# Altium PCB 主板-双BH(1).PcbDoc (part 13 of 13)
Units mm, origin at the board's own origin, x right, y up, seen from the top; angles counter-clockwise.
Board outline 97.69 x 103.45 mm, 2 copper layers (Top Layer, Bottom Layer); 78 components, 75 nets, 243 pads, 279 vias.
Unrouted connection lines stored in the file: 7.
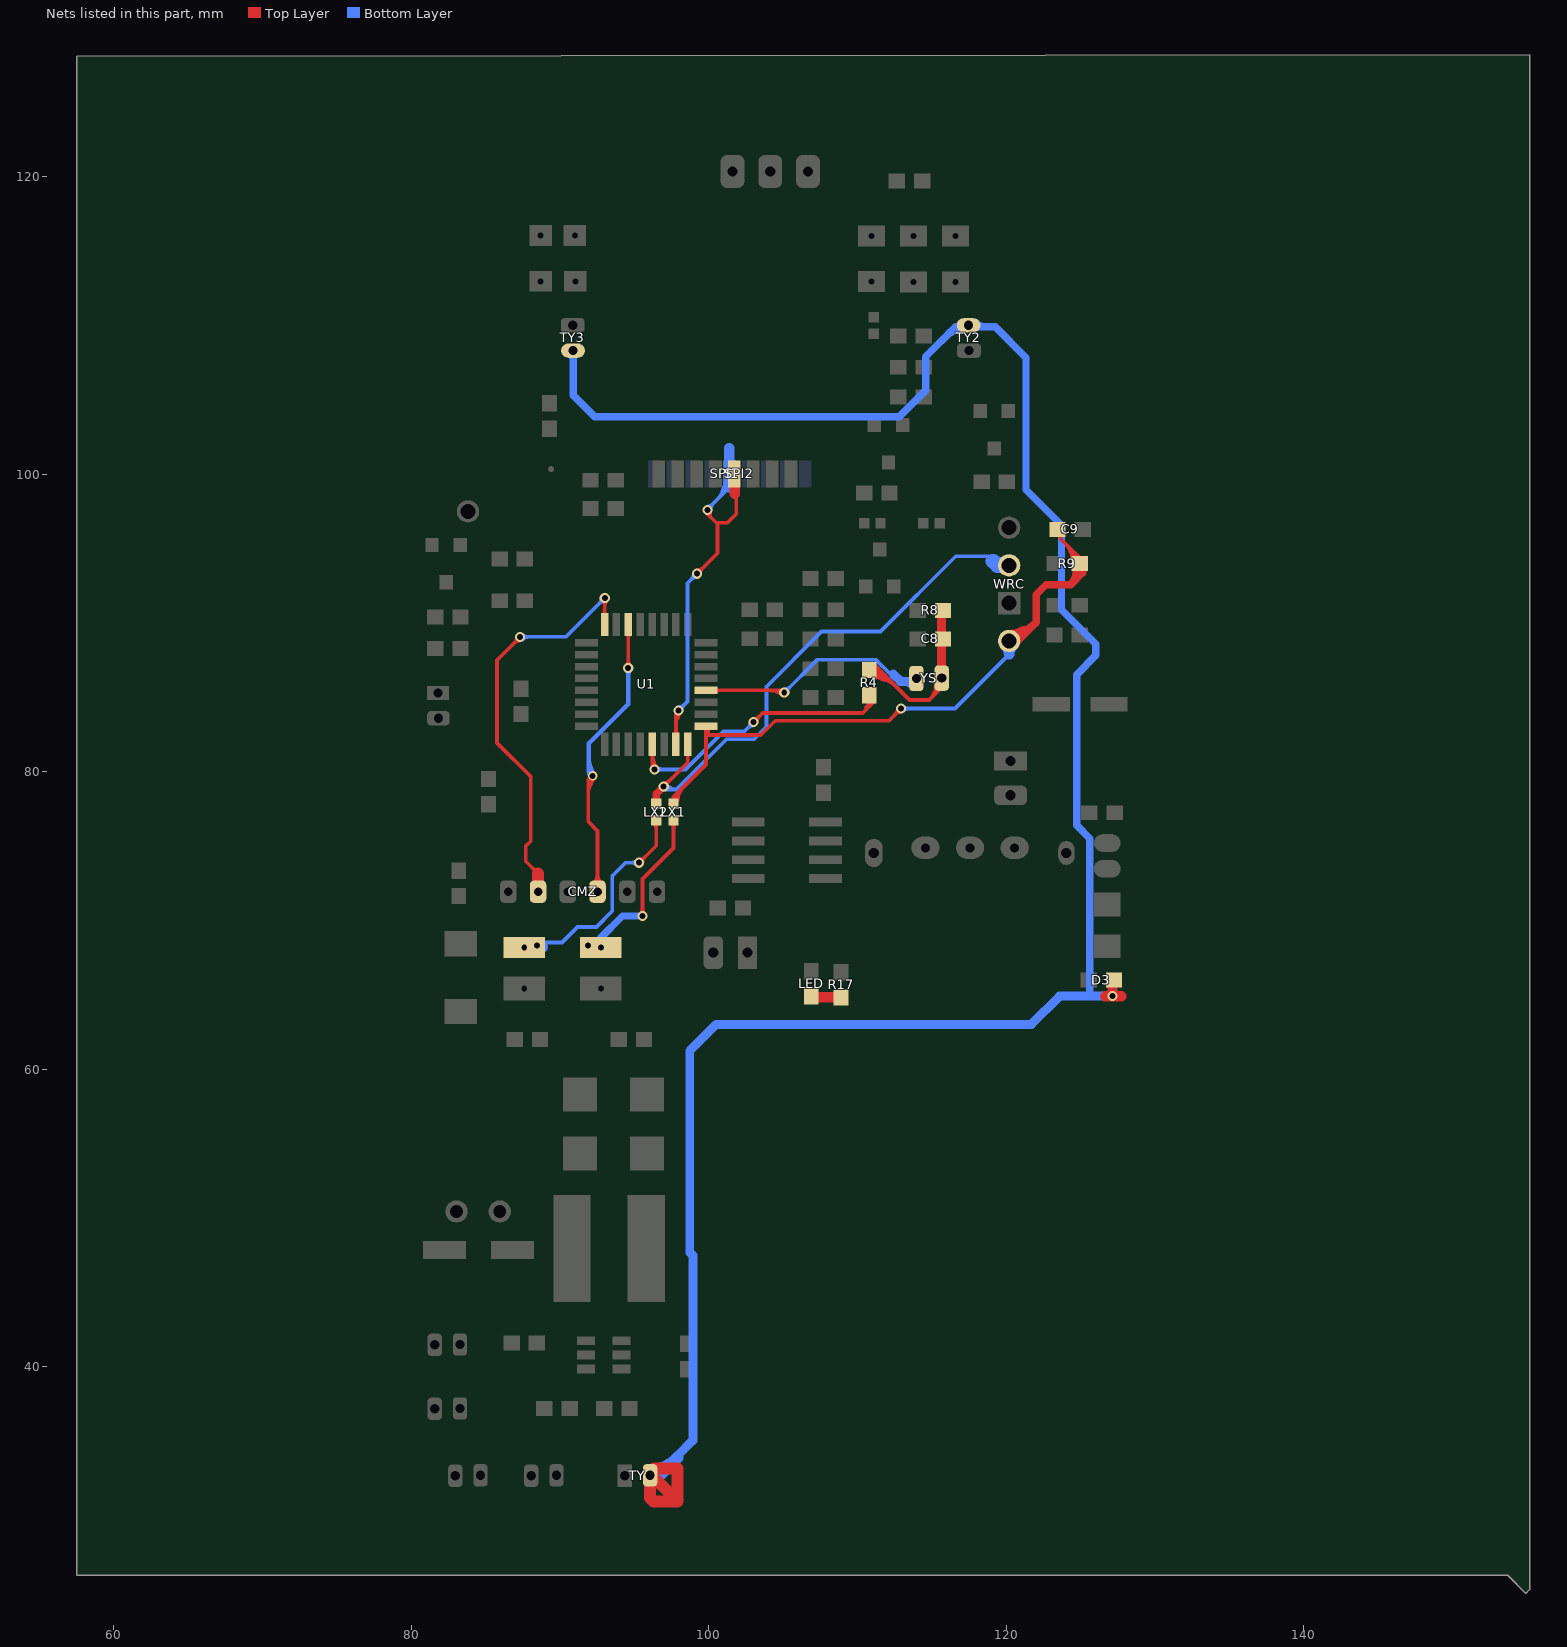
[diagram p13: the nets of this part, all layers, seen from the top]

## Via types
v1: diameter 0.7, hole 0.4, Top Layer to Bottom Layer, 108 vias
v2: diameter 0.68, hole 0.4, Top Layer to Bottom Layer, 87 vias
v3: diameter 0.8, hole 0.5, Top Layer to Bottom Layer, tented both sides, 33 vias
v4: diameter 0.6, hole 0.4, Top Layer to Bottom Layer, 12 vias
v5: diameter 0.9, hole 0.5, Top Layer to Bottom Layer, 8 vias
v6: diameter 0.8, hole 0.5, Top Layer to Bottom Layer, 6 vias
v7: diameter 1, hole 0.75, Top Layer to Bottom Layer, tented both sides, 5 vias
v8: diameter 3.4, hole 2.9, Top Layer to Bottom Layer, 4 vias
v9: diameter 1, hole 0.6, Top Layer to Bottom Layer, tented both sides, 3 vias
v10: diameter 1, hole 0.56, Top Layer to Bottom Layer, tented both sides, 2 vias
v11: diameter 1.1, hole 0.68, Top Layer to Bottom Layer, 2 vias
v12: diameter 0.8, hole 0.4, Top Layer to Bottom Layer, 2 vias
v13: diameter 0.65, hole 0.4, Top Layer to Bottom Layer, tented both sides, 2 vias
v14: diameter 1, hole 0.6, Top Layer to Bottom Layer, tented bottom, 1 vias
v15: diameter 0.7, hole 0.4, Top Layer to Bottom Layer, tented bottom, 1 vias
v16: diameter 0.95, hole 0.5, Top Layer to Bottom Layer, 1 vias
v17: diameter 0.64, hole 0.4, Top Layer to Bottom Layer, 1 vias
v18: diameter 0.62, hole 0.4, Top Layer to Bottom Layer, 1 vias

## Nets (pads, with @x,y where several pads share a name; then routed paths per layer and width w, separated by ;. In a path a pad name is that pad's centre, name@x,y a point inside that pad or via, vN(x,y) a via of type N, cw(c..) or ccw(c..) an arc to the next point about the centre after c; other vN are vias at no path point) (continued)
RST: C9.2 LX1.1 LX1.2 pad.0@92.75,68.182 R9.1 U1.1 WRC.1 | length 126.1
  Top Layer w0.254: v2@95.549,70.307 95.549,72.791 97.638,74.879 LX1.1@97.638,76.742 ; LX1.2@97.4,77.842 97.638,78.08 97.638,78.308 ; U1.1@99.977,83.122 U1.1@99.977,83.077 ; U1.1@100.082,82.931 U1.1@100.076,82.925 ; v2@112.878,84.252 v2(112.928,84.252) 112.116,83.439 104.47,83.439 103.505,82.474 100.025,82.474 99.977,82.522 U1.1@99.977,82.904 ; C9.2@123.45,96.3 123.699,96.051 123.699,95.63 125.12,94.209 R9.1@125.12,94.005 ; 124.416,94.625 cw(c124.07,94.266) R9.1@124.545,94.114 ; 124.531,94.515 ccw(c124.883,94.881) R9.1@124.893,94.373 ; v2@95.404,70.458 ccw(c95.055,70.807) 95.549,70.807 ; v2@95.404,70.458 ccw(c95.055,70.807) 95.549,70.807 ; v2@95.404,70.458 ccw(c95.055,70.807) 95.549,70.807 ; 95.549,70.836 ccw(c96.083,70.836) v2@95.705,70.458 ; 95.549,70.836 ccw(c96.083,70.836) v2@95.705,70.458 ; 95.549,70.836 ccw(c96.083,70.836) v2@95.705,70.458 ; LX1.1@97.48,76.584 cw(c97.099,76.204) 97.638,76.204 ; LX1.1@97.48,76.584 cw(c97.099,76.204) 97.638,76.204 ; LX1.1@97.48,76.584 cw(c97.099,76.204) 97.638,76.204 ; LX1.2@97.498,78.016 ccw(c97.262,78.308) 97.638,78.308 ; LX1.2@97.498,78.016 ccw(c97.262,78.308) 97.638,78.308 ; LX1.2@97.498,78.016 ccw(c97.262,78.308) 97.638,78.308 ; LX1.2@97.526,78.035 ccw(c97.308,78.413) 97.729,78.3 ; LX1.2@97.526,78.035 ccw(c97.308,78.413) 97.729,78.3 ; LX1.2@97.526,78.035 ccw(c97.308,78.413) 97.729,78.3 ; LX1.2@97.607,77.842 cw(c98.657,77.842) 97.914,78.585 ; LX1.2@97.607,77.842 cw(c98.657,77.842) 97.914,78.585 ; LX1.2@97.607,77.842 cw(c98.657,77.842) 97.914,78.585 ; 97.638,76.204 cw(c98.176,76.204) LX1.1@97.795,76.584 ; 97.638,76.204 cw(c98.176,76.204) LX1.1@97.795,76.584 ; 97.638,76.204 cw(c98.176,76.204) LX1.1@97.795,76.584 ; 97.638,78.308 ccw(c98.013,78.308) LX1.2@97.778,78.016 ; 97.638,78.308 ccw(c98.013,78.308) LX1.2@97.778,78.016 ; 97.638,78.308 ccw(c98.013,78.308) LX1.2@97.778,78.016 ; 97.638,78.308 99.825,80.496 U1.1@99.825,82.904 ; LX1.2@97.653,77.815 ccw(c97.323,78.387) 97.961,78.216 ; LX1.2@97.653,77.815 ccw(c97.323,78.387) 97.961,78.216 ; LX1.2@97.653,77.815 ccw(c97.323,78.387) 97.961,78.216 ; 97.734,78.317 ccw(c98.088,78.222) LX1.2@97.808,77.986 ; 97.734,78.317 ccw(c98.088,78.222) LX1.2@97.808,77.986 ; 97.734,78.317 ccw(c98.088,78.222) LX1.2@97.808,77.986 ; LX1.2@97.861,77.842 cw(c99.524,77.842) 98.348,79.019 ; LX1.2@97.861,77.842 cw(c99.524,77.842) 98.348,79.019 ; LX1.2@97.861,77.842 cw(c99.524,77.842) 98.348,79.019 ; U1.1@99.738,82.99 cw(c99.528,82.781) 99.825,82.781 ; U1.1@99.738,82.99 cw(c99.528,82.781) 99.825,82.781 ; U1.1@99.738,82.99 cw(c99.528,82.781) 99.825,82.781 ; U1.1@99.748,82.982 cw(c99.36,82.501) 99.977,82.501 ; U1.1@99.748,82.982 cw(c99.36,82.501) 99.977,82.501 ; U1.1@99.748,82.982 cw(c99.36,82.501) 99.977,82.501 ; 99.825,82.781 cw(c100.122,82.781) U1.1@99.912,82.99 ; 99.825,82.781 cw(c100.122,82.781) U1.1@99.912,82.99 ; 99.825,82.781 cw(c100.122,82.781) U1.1@99.912,82.99 ; U1.1@99.825,82.904 U1.1@99.977,82.904 ; U1.1@99.825,82.904 U1.1@99.825,83.077 ; U1.1@99.825,83.077 U1.1@99.977,83.077 ; U1.1@99.825,83.077 100.228,83.077 U1.1@100.076,82.925 ; 99.914,82.754 cw(c100.076,82.873) U1.1@99.92,83 ; 99.914,82.754 cw(c100.076,82.873) U1.1@99.92,83 ; 99.914,82.754 cw(c100.076,82.873) U1.1@99.92,83 ; U1.1@99.977,82.904 100.076,82.904 U1.1@100.076,82.925 ; U1.1@99.977,82.904 U1.1@99.977,83.077 ; 112.565,83.888 ccw(c112.201,84.252) v2@112.715,84.252 ; 112.565,83.888 cw(c112.928,83.525) v2@112.928,84.039 ; 112.565,83.888 ccw(c112.201,84.252) v2@112.715,84.252 ; 112.565,83.888 cw(c112.928,83.525) v2@112.928,84.039 ; 112.565,83.888 ccw(c112.201,84.252) v2@112.715,84.252 ; 112.565,83.888 cw(c112.928,83.525) v2@112.928,84.039 ; C9.2@123.426,95.934 cw(c123.359,95.602) 123.699,95.602 ; C9.2@123.426,95.934 cw(c123.359,95.602) 123.699,95.602 ; C9.2@123.426,95.934 cw(c123.359,95.602) 123.699,95.602 ; 123.96,95.369 cw(c122.591,94) R9.1@124.527,94 ; 123.96,95.369 cw(c122.591,94) R9.1@124.527,94 ; 123.96,95.369 cw(c122.591,94) R9.1@124.527,94 ; 124.261,94.994 ccw(c125.655,95.368) R9.1@124.957,94.104 ; 124.261,94.994 ccw(c125.655,95.368) R9.1@124.957,94.104 ; 124.261,94.994 ccw(c125.655,95.368) R9.1@124.957,94.104 ; 124.393,94.936 cw(c123.458,94) R9.1@124.781,94 ; 124.393,94.936 cw(c123.458,94) R9.1@124.781,94 ; 124.393,94.936 cw(c123.458,94) R9.1@124.781,94 ; R9.1@124.415,94.418 ccw(c125.255,94.643) R9.1@124.835,93.882 ; R9.1@124.415,94.418 ccw(c125.255,94.643) R9.1@124.835,93.882 ; R9.1@124.415,94.418 ccw(c125.255,94.643) R9.1@124.835,93.882 ; R9.1@124.577,94.186 ccw(c124.137,94.441) 124.628,94.572 ; R9.1@124.577,94.186 ccw(c124.137,94.441) 124.628,94.572 ; R9.1@124.577,94.186 ccw(c124.137,94.441) 124.628,94.572 ; 124.827,94.502 cw(c124.325,94) R9.1@125.035,94 ; 124.827,94.502 cw(c124.325,94) R9.1@125.035,94 ; 124.827,94.502 cw(c124.325,94) R9.1@125.035,94
  Top Layer w0.5: WRC.1@120.349,89.277 ccw(c120.474,89.678) 120.774,89.384 ccw(c121.073,89.089) WRC.1@120.675,88.957 ; R9.1@125.12,94.005 125.15,93.976 125.15,93.4 124.333,92.583 ; WRC.1@120.2,88.8 ccw(c120.213,90.167) 121.179,89.2 ; WRC.1@120.2,88.8 ccw(c120.213,90.167) 121.179,89.2 ; WRC.1@120.2,88.8 cw(c121.576,88.021) 121.181,89.552 ; WRC.1@120.2,88.8 ccw(c120.213,90.167) 121.179,89.2 ; WRC.1@120.2,88.8 cw(c121.576,88.021) 121.181,89.552 ; WRC.1@120.2,88.8 cw(c121.576,88.021) 121.181,89.552 ; WRC.1@120.2,88.8 120.779,88.8 122.022,90.043 ; WRC.1@120.205,89.3 ccw(c120.228,91.837) 122.022,90.043 ; WRC.1@120.205,89.3 ccw(c120.228,91.837) 122.022,90.043 ; WRC.1@120.205,89.3 ccw(c120.228,91.837) 122.022,90.043 ; 122.022,90.043 122.022,91.923 122.682,92.583 124.333,92.583 ; 124.333,92.583 ccw(c123.391,93.525) R9.1@124.662,93.925 ; 124.333,92.583 ccw(c123.391,93.525) R9.1@124.662,93.925 ; 124.333,92.583 ccw(c123.391,93.525) R9.1@124.662,93.925 ; R9.1@124.897,93.772 cw(c124.722,93.382) 125.15,93.382 ; R9.1@124.897,93.772 cw(c124.722,93.382) 125.15,93.382 ; R9.1@124.897,93.772 cw(c124.722,93.382) 125.15,93.382 ; 124.916,93.166 ccw(c124.278,93.804) R9.1@125.138,94.075 ; 124.916,93.166 ccw(c124.278,93.804) R9.1@125.138,94.075 ; 124.916,93.166 ccw(c124.278,93.804) R9.1@125.138,94.075
  Top Layer w0.7: pad.0@92.75,68.182 pad.0@93.337,68.182
  Bottom Layer w0.254: v2@112.878,84.252 116.561,84.252 120.2,87.891 ; v2@113.079,84.101 cw(c113.443,83.738) 113.443,84.252 ; v2@113.079,84.101 cw(c113.443,83.738) 113.443,84.252 ; v2@113.079,84.101 cw(c113.443,83.738) 113.443,84.252 ; v2@113.079,84.402 ccw(c113.443,84.766) 113.443,84.252 ; v2@113.079,84.402 ccw(c113.443,84.766) 113.443,84.252 ; v2@113.079,84.402 ccw(c113.443,84.766) 113.443,84.252
  Bottom Layer w0.3: pad.0@92.75,68.182 pad.0@92.75,68.849
  Bottom Layer w0.5: pad.0@92.75,68.849 94.209,70.307 v2(95.555,70.307)
  Bottom Layer w0.7: WRC.1@120.2,88.8 120.2,87.891 ; WRC.1@119.93,88.505 cw(c119.368,87.891) 120.2,87.891 ; WRC.1@119.93,88.505 cw(c119.368,87.891) 120.2,87.891 ; WRC.1@119.93,88.505 cw(c119.368,87.891) 120.2,87.891 ; 120.2,87.891 cw(c121.032,87.891) WRC.1@120.47,88.505 ; 120.2,87.891 cw(c121.032,87.891) WRC.1@120.47,88.505 ; 120.2,87.891 cw(c121.032,87.891) WRC.1@120.47,88.505
  other v12: 91.897,68.326
RT: 
SCK: SPI1.4 SPI2.4 U1.31 | length 64.8
  Top Layer w0.254: U1.31@97.8,81.853 97.8,83.957 v2(97.968,84.125) ; v2(99.212,93.32) 100.584,94.691 100.584,96.672 100.508,96.749 ; v2(99.924,97.612) 99.924,97.333 100.101,97.155 ; v2@100.101,97.434 100.101,97.155 ; SPI1.4@101.727,100.032 SPI1.4@101.727,100.406 ; SPI1.4@101.854,100.406 101.854,97.333 101.27,96.749 100.508,96.749 ; U1.31@97.713,82.464 ccw(c97.503,82.674) 97.8,82.674 ; U1.31@97.713,82.464 ccw(c97.503,82.674) 97.8,82.674 ; U1.31@97.713,82.464 ccw(c97.503,82.674) 97.8,82.674 ; 97.8,82.674 ccw(c98.097,82.674) U1.31@97.887,82.464 ; 97.8,82.674 ccw(c98.097,82.674) U1.31@97.887,82.464 ; 97.8,82.674 ccw(c98.097,82.674) U1.31@97.887,82.464 ; 97.8,83.206 cw(c98.887,83.206) v2@98.118,83.974 ; 97.8,83.206 cw(c98.887,83.206) v2@98.118,83.974 ; 97.8,83.206 cw(c98.887,83.206) v2@98.118,83.974 ; 97.8,83.819 cw(c98.274,83.819) v2@97.939,84.154 ; 97.8,83.819 cw(c98.274,83.819) v2@97.939,84.154 ; 97.8,83.819 cw(c98.274,83.819) v2@97.939,84.154 ; v2@97.831,83.962 cw(c97.642,83.737) 97.897,83.59 ; v2@97.831,83.962 cw(c97.642,83.737) 97.897,83.59 ; v2@97.831,83.962 cw(c97.642,83.737) 97.897,83.59 ; v2@99.212,93.533 ccw(c99.212,94.047) 99.576,93.683 ; v2@99.212,93.533 ccw(c99.212,94.047) 99.576,93.683 ; v2@99.212,93.533 ccw(c99.212,94.047) 99.576,93.683 ; v2@99.425,93.32 cw(c99.94,93.32) 99.576,93.683 ; v2@99.425,93.32 cw(c99.94,93.32) 99.576,93.683 ; v2@99.425,93.32 cw(c99.94,93.32) 99.576,93.683 ; v2@99.876,97.405 cw(c99.811,97.122) 100.101,97.122 ; v2@99.876,97.405 cw(c99.811,97.122) 100.101,97.122 ; v2@99.876,97.405 cw(c99.811,97.122) 100.101,97.122 ; v2@100.087,97.476 ccw(c100.27,97.323) 100.101,97.155 ; v2@100.087,97.476 ccw(c100.27,97.323) 100.101,97.155 ; v2@100.087,97.476 ccw(c100.27,97.323) 100.101,97.155 ; 100.101,97.155 100.508,96.749 ; SPI1.4@101.516,99.346 cw(c100.701,98.531) 101.854,98.531 ; SPI1.4@101.516,99.346 cw(c100.701,98.531) 101.854,98.531 ; SPI1.4@101.516,99.346 cw(c100.701,98.531) 101.854,98.531 ; SPI1.4@101.696,99.526 cw(c101.314,99.144) SPI1.4@101.854,99.144 ; SPI1.4@101.696,99.526 cw(c101.314,99.144) SPI1.4@101.854,99.144 ; SPI1.4@101.696,99.526 cw(c101.314,99.144) SPI1.4@101.854,99.144 ; SPI1.4@101.854,99.144 cw(c102.14,99.144) SPI1.4@101.938,99.346 ; SPI1.4@101.854,99.144 cw(c102.14,99.144) SPI1.4@101.938,99.346 ; SPI1.4@101.854,99.144 cw(c102.14,99.144) SPI1.4@101.938,99.346
  Top Layer w0.7: SPI1.4@101.727,100.406 SPI1.4@101.759,99.955 ; 101.752,98.679 SPI1.4@101.752,100.21
  Bottom Layer w0.254: v2(97.968,84.125) 98.577,84.734 98.577,92.685 v2(99.212,93.32) ; v2@99.898,97.638 SPI2.4@101.397,99.136 ; SPI2.4@101.124,99.473 cw(c100.78,99.373) 101.033,99.12 cw(c101.371,98.783) SPI2.4@101.395,99.259 ; v2@97.968,84.338 ccw(c97.968,84.852) 98.331,84.488 ; v2@97.968,84.338 ccw(c97.968,84.852) 98.331,84.488 ; v2@97.968,84.338 ccw(c97.968,84.852) 98.331,84.488 ; v2@98.181,84.125 cw(c98.695,84.125) 98.331,84.488 ; v2@98.181,84.125 cw(c98.695,84.125) 98.331,84.488 ; v2@98.181,84.125 cw(c98.695,84.125) 98.331,84.488 ; 98.849,92.956 ccw(c98.485,93.32) v2@98.999,93.32 ; 98.849,92.956 cw(c99.212,92.592) v2@99.212,93.107 ; 98.849,92.956 ccw(c98.485,93.32) v2@98.999,93.32 ; 98.849,92.956 cw(c99.212,92.592) v2@99.212,93.107 ; 98.849,92.956 ccw(c98.485,93.32) v2@98.999,93.32 ; 98.849,92.956 cw(c99.212,92.592) v2@99.212,93.107 ; v2@99.924,97.825 ccw(c99.924,98.217) 100.2,97.94 ; v2@99.924,97.825 ccw(c99.924,98.217) 100.2,97.94 ; v2@99.924,97.825 ccw(c99.924,98.217) 100.2,97.94 ; v2@100.137,97.612 cw(c100.773,97.612) 100.323,98.063 ; v2@100.137,97.612 cw(c100.773,97.612) 100.323,98.063 ; v2@100.137,97.612 cw(c100.773,97.612) 100.323,98.063 ; 100.613,98.353 ccw(c99.409,99.557) SPI2.4@101.112,99.557 ; 100.613,98.353 ccw(c99.409,99.557) SPI2.4@101.112,99.557 ; 100.613,98.353 ccw(c99.409,99.557) SPI2.4@101.112,99.557 ; 100.925,98.857 cw(c101.976,98.576) SPI2.4@101.432,99.519 ; 100.925,98.857 cw(c101.976,98.576) SPI2.4@101.432,99.519 ; 100.925,98.857 cw(c101.976,98.576) SPI2.4@101.432,99.519 ; 101.047,98.786 ccw(c100.276,99.557) SPI2.4@101.366,99.557 ; 101.047,98.786 ccw(c100.276,99.557) SPI2.4@101.366,99.557 ; 101.047,98.786 ccw(c100.276,99.557) SPI2.4@101.366,99.557 ; SPI2.4@101.152,99.408 cw(c100.655,99.121) 101.209,98.972 ; SPI2.4@101.152,99.408 cw(c100.655,99.121) 101.209,98.972 ; SPI2.4@101.152,99.408 cw(c100.655,99.121) 101.209,98.972 ; 101.201,98.941 cw(c101.675,98.814) SPI2.4@101.51,99.276 ; 101.201,98.941 cw(c101.675,98.814) SPI2.4@101.51,99.276 ; 101.201,98.941 cw(c101.675,98.814) SPI2.4@101.51,99.276
  Bottom Layer w0.7: SPI2.4@101.397,99.136 101.397,101.752
SWIM: LX2.1 LX2.2 pad.0@87.6,68.182 U1.32 WRC.3 | length 71.2
  Top Layer w0.254: v2(95.326,73.889) 96.469,75.032 LX2.1@96.469,76.742 ; v2(96.977,79.019) 98.6,80.642 U1.32@98.6,81.852 ; v2@95.326,74.102 ccw(c95.326,74.616) 95.69,74.252 ; v2@95.326,74.102 ccw(c95.326,74.616) 95.69,74.252 ; v2@95.326,74.102 ccw(c95.326,74.616) 95.69,74.252 ; v2@95.539,73.889 cw(c96.053,73.889) 95.69,74.252 ; v2@95.539,73.889 cw(c96.053,73.889) 95.69,74.252 ; v2@95.539,73.889 cw(c96.053,73.889) 95.69,74.252 ; LX2.1@96.312,76.584 cw(c95.931,76.204) 96.469,76.204 ; LX2.1@96.312,76.584 cw(c95.931,76.204) 96.469,76.204 ; LX2.1@96.312,76.584 cw(c95.931,76.204) 96.469,76.204 ; 96.469,76.204 cw(c97.008,76.204) LX2.1@96.627,76.584 ; 96.469,76.204 cw(c97.008,76.204) LX2.1@96.627,76.584 ; 96.469,76.204 cw(c97.008,76.204) LX2.1@96.627,76.584 ; v2@96.977,79.232 ccw(c96.977,79.747) 97.341,79.383 ; v2@96.977,79.232 ccw(c96.977,79.747) 97.341,79.383 ; v2@96.977,79.232 ccw(c96.977,79.747) 97.341,79.383 ; v2@97.19,79.019 cw(c97.704,79.019) 97.341,79.383 ; v2@97.19,79.019 cw(c97.704,79.019) 97.341,79.383 ; v2@97.19,79.019 cw(c97.704,79.019) 97.341,79.383 ; U1.32@98.513,81.24 cw(c98.303,81.031) 98.6,81.031 ; U1.32@98.513,81.24 cw(c98.303,81.031) 98.6,81.031 ; U1.32@98.513,81.24 cw(c98.303,81.031) 98.6,81.031 ; 98.6,81.031 cw(c98.897,81.031) U1.32@98.687,81.24 ; 98.6,81.031 cw(c98.897,81.031) U1.32@98.687,81.24 ; 98.6,81.031 cw(c98.897,81.031) U1.32@98.687,81.24
  Top Layer w0.5: LX2.2@96.469,77.842 96.469,78.511 v2(96.977,79.019)
  Bottom Layer w0.254: 89.103,68.529 90.145,68.529 91.186,69.571 92.456,69.571 93.523,70.637 93.523,73 94.412,73.889 v2(95.326,73.889) ; v2(96.977,79.019) 96.977,78.816 97.823,78.816 ; v2@97.104,79.121 97.358,78.867 ; 119.126,94.158 119.126,94.488 116.611,94.488 111.557,89.433 107.594,89.433 103.886,85.725 103.886,83.033 103.048,82.194 101.201,82.194 97.823,78.816 ; 94.812,73.889 ccw(c94.812,74.403) v2@95.176,74.039 ; 94.812,73.889 cw(c94.812,73.374) v2@95.176,73.738 ; 94.812,73.889 ccw(c94.812,74.403) v2@95.176,74.039 ; 94.812,73.889 cw(c94.812,73.374) v2@95.176,73.738 ; 94.812,73.889 ccw(c94.812,74.403) v2@95.176,74.039 ; 94.812,73.889 cw(c94.812,73.374) v2@95.176,73.738 ; v2@96.945,78.994 ccw(c97.307,79.273) 97.307,78.816 ; v2@96.945,78.994 ccw(c97.307,79.273) 97.307,78.816 ; v2@96.945,78.994 ccw(c97.307,79.273) 97.307,78.816 ; v2@97.127,78.868 cw(c97.242,78.751) 97.358,78.867 ; v2@97.127,78.868 cw(c97.242,78.751) 97.358,78.867 ; v2@97.127,78.868 cw(c97.242,78.751) 97.358,78.867 ; v2@97.139,78.881 cw(c97.314,78.733) 97.453,78.915 ; v2@97.139,78.881 cw(c97.314,78.733) 97.453,78.915 ; v2@97.139,78.881 cw(c97.314,78.733) 97.453,78.915 ; v2@97.146,79.149 ccw(c97.823,79.67) 97.823,78.816 ; v2@97.146,79.149 ccw(c97.823,79.67) 97.823,78.816 ; v2@97.146,79.149 ccw(c97.823,79.67) 97.823,78.816
  Bottom Layer w0.8: pad.0@87.6,68.182 pad.0@87.968,68.182 ; pad.0@87.986,68.199 88.773,68.199 pad.0@88.809,68.235
  Bottom Layer w1: WRC.3@120.2,93.853 119.431,93.853 119.126,94.158 ; 119.126,94.158 ccw(c119.634,94.666) WRC.3@120.054,94.083 ; 119.126,94.158 ccw(c119.634,94.666) WRC.3@120.054,94.083 ; 119.126,94.158 ccw(c119.634,94.666) WRC.3@120.054,94.083
  other v12: 88.443,68.326
SWIM/BT: 
T-LED: LED.1 R17.1 | length 2
  Top Layer w0.7: LED.1@106.9,64.831 107.544,64.831 R17.1@108.9,64.831
TEMP: 
TY: D3.2 TY2.1 TY3.1 TY.1 | length 182.6
  Top Layer w0.7: 126.644,64.922 127.737,64.922 ; v2(127.15,64.92) D3.2@127.15,66
  Top Layer w0.8: TY.1@96.319,32.545 TY.1@96.064,32.8 ; TY.1@96.319,33.172 97.917,33.172 97.917,30.947 ; TY.1@96.064,32.35 cw(c96.064,31.264) 96.832,32.032 ; TY.1@96.064,32.35 cw(c96.064,31.264) 96.832,32.032 ; TY.1@96.064,32.35 cw(c96.064,31.264) 96.832,32.032 ; TY.1@96.064,32.8 96.064,31.165 96.282,30.947 97.917,30.947 ; TY.1@96.064,32.8 97.917,30.947 ; TY.1@96.121,32.913 cw(c96.746,32.288) 96.746,33.172 ; TY.1@96.121,32.913 cw(c96.746,32.288) 96.746,33.172 ; TY.1@96.121,32.913 cw(c96.746,32.288) 96.746,33.172
  Bottom Layer w0.5: TY3.1@90.881,108.419 90.881,105.308 92.329,103.861 112.801,103.861 114.605,105.664 114.605,107.925 116.599,109.919 ; 116.475,109.653 cw(c116.9,109.228) TY2.1@117.084,109.8 ; 125.628,64.922 125.628,75.514 124.739,76.403 124.739,86.538 126.035,87.833 126.035,88.595 123.723,90.907 123.723,96.571 121.336,98.958 121.336,107.848 119.265,109.919 116.599,109.919 ; 125.882,64.922 125.885,64.92 v2(127.15,64.92) ; TY3.1@90.719,108.156 cw(c90.326,107.764) 90.881,107.764 ; TY3.1@90.719,108.156 cw(c90.326,107.764) 90.881,107.764 ; TY3.1@90.719,108.156 cw(c90.326,107.764) 90.881,107.764 ; 90.881,107.764 cw(c91.436,107.764) TY3.1@91.044,108.156 ; 90.881,107.764 cw(c91.436,107.764) TY3.1@91.044,108.156 ; 90.881,107.764 cw(c91.436,107.764) TY3.1@91.044,108.156 ; 115.984,109.304 cw(c117.155,108.133) TY2.1@117.155,109.789 ; 115.984,109.304 cw(c117.155,108.133) TY2.1@117.155,109.789 ; 115.984,109.304 cw(c117.155,108.133) TY2.1@117.155,109.789 ; 116.158,109.522 ccw(c115.818,110.791) TY2.1@116.956,110.134 ; 116.158,109.522 ccw(c115.818,110.791) TY2.1@116.956,110.134 ; 116.158,109.522 ccw(c115.818,110.791) TY2.1@116.956,110.134 ; 116.599,109.919 ccw(c116.599,110.322) TY2.1@116.953,110.129 ; 116.599,109.919 ccw(c116.599,110.322) TY2.1@116.953,110.129 ; 116.599,109.919 ccw(c116.599,110.322) TY2.1@116.953,110.129 ; TY2.1@117.958,110.182 ccw(c118.591,110.815) 118.591,109.919 ; TY2.1@117.958,110.182 ccw(c118.591,110.815) 118.591,109.919 ; TY2.1@117.958,110.182 ccw(c118.591,110.815) 118.591,109.919
  Bottom Layer w0.6: 97.917,33.884 97.917,34.033 98.933,35.049 98.933,47.487 98.73,47.69 98.73,61.239 100.508,63.017 121.691,63.017 123.596,64.922 v2@127.15,64.922
  Bottom Layer w0.8: TY.1@96.064,32.8 96.808,32.8 97.917,33.909 97.917,33.884 ; TY.1@96.064,33.05 ccw(c96.064,35.45) 97.761,33.753 ; TY.1@96.064,33.05 ccw(c96.064,35.45) 97.761,33.753 ; TY.1@96.064,33.05 ccw(c96.064,35.45) 97.761,33.753
Y30: CMZ.6 U1.16 | length 38.9
  Top Layer w0.254: v2(87.325,89.052) 85.776,87.503 85.776,81.94 88.036,79.68 88.036,75.336 87.706,75.006 87.706,73.99 88.53,73.166 ; U1.16@93,89.902 93,90.917 93.015,90.932 v2(93.015,91.694) ; 86.962,88.689 ccw(c86.598,89.052) v2@87.112,89.052 ; 86.962,88.689 cw(c87.325,88.325) v2@87.325,88.839 ; 86.962,88.689 ccw(c86.598,89.052) v2@87.112,89.052 ; 86.962,88.689 cw(c87.325,88.325) v2@87.325,88.839 ; 86.962,88.689 ccw(c86.598,89.052) v2@87.112,89.052 ; 86.962,88.689 cw(c87.325,88.325) v2@87.325,88.839 ; v2@92.864,91.543 cw(c92.501,91.18) 93.015,91.18 ; v2@92.864,91.543 cw(c92.501,91.18) 93.015,91.18 ; v2@92.864,91.543 cw(c92.501,91.18) 93.015,91.18 ; U1.16@92.913,90.514 ccw(c92.703,90.724) 93,90.724 ; U1.16@92.913,90.514 ccw(c92.703,90.724) 93,90.724 ; U1.16@92.913,90.514 ccw(c92.703,90.724) 93,90.724 ; 93,90.724 ccw(c93.297,90.724) U1.16@93.087,90.514 ; 93,90.724 ccw(c93.297,90.724) U1.16@93.087,90.514 ; 93,90.724 ccw(c93.297,90.724) U1.16@93.087,90.514 ; 93.015,91.18 cw(c93.529,91.18) v2@93.165,91.543 ; 93.015,91.18 cw(c93.529,91.18) v2@93.165,91.543 ; 93.015,91.18 cw(c93.529,91.18) v2@93.165,91.543
  Top Layer w0.8: CMZ.6@88.53,71.944 88.53,73.166
  Bottom Layer w0.254: v2@87.3,89.078 90.399,89.078 v2(93.015,91.694) ; v2@87.476,88.902 cw(c87.901,88.477) 87.901,89.078 ; v2@87.476,88.902 cw(c87.901,88.477) 87.901,89.078 ; v2@87.476,88.902 cw(c87.901,88.477) 87.901,89.078 ; v2@87.476,89.203 ccw(c87.778,89.505) 87.778,89.078 ; v2@87.476,89.203 ccw(c87.778,89.505) 87.778,89.078 ; v2@87.476,89.203 ccw(c87.778,89.505) 87.778,89.078 ; 92.651,91.33 ccw(c92.288,91.694) v2@92.802,91.694 ; 92.651,91.33 cw(c93.015,90.967) v2@93.015,91.481 ; 92.651,91.33 ccw(c92.288,91.694) v2@92.802,91.694 ; 92.651,91.33 cw(c93.015,90.967) v2@93.015,91.481 ; 92.651,91.33 ccw(c92.288,91.694) v2@92.802,91.694 ; 92.651,91.33 cw(c93.015,90.967) v2@93.015,91.481
Y30-D: 
Y>: CMZ.4 U1.14 | length 47.7
  Top Layer w0.254: v17(92.202,79.731) 91.897,79.426 ; CMZ.4@92.53,71.944 92.53,76.024 91.897,76.657 91.897,79.426 ; v2@94.6,86.97 U1.14@94.6,89.902 ; 91.897,78.529 cw(c93.404,78.529) v17@92.338,79.594 ; 91.897,78.529 cw(c93.404,78.529) v17@92.338,79.594 ; 91.897,78.529 cw(c93.404,78.529) v17@92.338,79.594 ; 91.897,79.142 cw(c92.791,79.142) v17@92.159,79.774 ; 91.897,79.142 cw(c92.791,79.142) v17@92.159,79.774 ; 91.897,79.142 cw(c92.791,79.142) v17@92.159,79.774 ; 91.897,79.426 ccw(c91.625,79.698) v17@92.009,79.72 ; 91.897,79.426 cw(c92.169,79.154) v17@92.191,79.538 ; 91.897,79.426 ccw(c91.625,79.698) v17@92.009,79.72 ; 91.897,79.426 cw(c92.169,79.154) v17@92.191,79.538 ; 91.897,79.426 ccw(c91.625,79.698) v17@92.009,79.72 ; 91.897,79.426 cw(c92.169,79.154) v17@92.191,79.538 ; 91.911,79.344 cw(c92.25,79.148) v17@92.218,79.538 ; 91.911,79.344 cw(c92.25,79.148) v17@92.218,79.538 ; 91.911,79.344 cw(c92.25,79.148) v17@92.218,79.538 ; 91.989,79.48 ccw(c91.76,79.612) v17@92.016,79.681 ; 91.989,79.48 ccw(c91.76,79.612) v17@92.016,79.681 ; 91.989,79.48 ccw(c91.76,79.612) v17@92.016,79.681 ; 92.002,79.012 ccw(c91.41,79.354) v17@92.028,79.648 ; 92.002,79.012 ccw(c91.41,79.354) v17@92.028,79.648 ; 92.002,79.012 ccw(c91.41,79.354) v17@92.028,79.648 ; CMZ.4@92.231,72.443 ccw(c91.509,73.165) 92.53,73.165 ; CMZ.4@92.231,72.443 ccw(c91.509,73.165) 92.53,73.165 ; CMZ.4@92.231,72.443 ccw(c91.509,73.165) 92.53,73.165 ; 92.53,73.165 ccw(c93.551,73.165) CMZ.4@92.829,72.443 ; 92.53,73.165 ccw(c93.551,73.165) CMZ.4@92.829,72.443 ; 92.53,73.165 ccw(c93.551,73.165) CMZ.4@92.829,72.443 ; v2@94.439,87.12 ccw(c94.05,87.509) 94.6,87.509 ; v2@94.439,87.12 ccw(c94.05,87.509) 94.6,87.509 ; v2@94.439,87.12 ccw(c94.05,87.509) 94.6,87.509 ; U1.14@94.513,89.29 cw(c94.303,89.08) 94.6,89.08 ; U1.14@94.513,89.29 cw(c94.303,89.08) 94.6,89.08 ; U1.14@94.513,89.29 cw(c94.303,89.08) 94.6,89.08 ; 94.6,87.459 ccw(c95.079,87.459) v2@94.74,87.12 ; 94.6,87.459 ccw(c95.079,87.459) v2@94.74,87.12 ; 94.6,87.459 ccw(c95.079,87.459) v2@94.74,87.12 ; 94.6,89.08 cw(c94.897,89.08) U1.14@94.687,89.29 ; 94.6,89.08 cw(c94.897,89.08) U1.14@94.687,89.29 ; 94.6,89.08 cw(c94.897,89.08) U1.14@94.687,89.29
  Bottom Layer w0.3: v17(92.202,79.731) 91.948,79.985 91.948,81.915 94.59,84.557 v2(94.59,86.97) ; 91.948,80.03 ccw(c92.501,80.03) v17@92.11,79.639 ; 91.948,80.03 ccw(c92.501,80.03) v17@92.11,79.639 ; 91.948,80.03 ccw(c92.501,80.03) v17@92.11,79.639 ; 91.948,80.754 ccw(c93.226,80.754) v17@92.322,79.851 ; 91.948,80.754 ccw(c93.226,80.754) v17@92.322,79.851 ; 91.948,80.754 ccw(c93.226,80.754) v17@92.322,79.851 ; 92.039,80.341 cw(c91.559,80.064) v17@92.051,79.809 ; 92.039,80.341 cw(c91.559,80.064) v17@92.051,79.809 ; 92.039,80.341 cw(c91.559,80.064) v17@92.051,79.809 ; v2@94.455,86.835 cw(c94.131,86.511) 94.59,86.511 ; v2@94.455,86.835 cw(c94.131,86.511) 94.59,86.511 ; v2@94.455,86.835 cw(c94.131,86.511) 94.59,86.511 ; 94.59,86.511 cw(c95.048,86.511) v2@94.724,86.835 ; 94.59,86.511 cw(c95.048,86.511) v2@94.724,86.835 ; 94.59,86.511 cw(c95.048,86.511) v2@94.724,86.835
YS: C8.2 R4.1 R8.1 YS.1 | length 62.6
  Top Layer w0.254: R4.1@110.846,87.147 111.201,87.147 113.513,84.836 114.833,84.836 115.664,85.667 YS.1@115.664,86.075 ; R4.1@110.88,86.712 cw(c111.139,86.431) 111.409,86.701 ; R4.1@110.917,86.446 cw(c111.091,85.923) 111.47,86.323 ; R4.1@111.052,86.525 cw(c111.318,86.235) 111.596,86.513 ; R4.1@111.173,86.81 ccw(c111.681,86.823) 111.331,86.455 ; 111.328,86.817 111.133,86.736 111.735,86.487 ; YS.1@115.336,85.799 cw(c115.074,85.694) 115.251,85.474 cw(c115.561,85.091) YS.1@115.621,85.58 ; R4.1@110.685,86.729 ccw(c111.463,87.206) R4.1@111.25,86.319 ; R4.1@110.685,86.729 ccw(c111.463,87.206) R4.1@111.25,86.319 ; R4.1@110.685,86.729 ccw(c111.463,87.206) R4.1@111.25,86.319 ; R4.1@110.8,86.427 cw(c110.8,83.719) 112.715,85.634 ; R4.1@110.8,86.427 cw(c110.8,83.719) 112.715,85.634 ; R4.1@110.8,86.427 cw(c110.8,83.719) 112.715,85.634 ; R4.1@110.8,86.681 cw(c110.8,84.586) 112.281,86.068 ; R4.1@110.8,86.681 cw(c110.8,84.586) 112.281,86.068 ; R4.1@110.8,86.681 cw(c110.8,84.586) 112.281,86.068 ; R4.1@110.8,86.935 cw(c110.8,85.454) 111.847,86.501 ; R4.1@110.8,86.935 cw(c110.8,85.454) 111.847,86.501 ; R4.1@110.8,86.935 cw(c110.8,85.454) 111.847,86.501 ; R4.1@110.8,87.189 cw(c110.8,86.321) 111.414,86.935 ; R4.1@110.8,87.189 cw(c110.8,86.321) 111.414,86.935 ; R4.1@110.8,87.189 cw(c110.8,86.321) 111.414,86.935 ; R4.1@110.901,86.862 ccw(c112.202,87.659) 111.846,86.176 ; R4.1@110.901,86.862 ccw(c112.202,87.659) 111.846,86.176 ; R4.1@110.901,86.862 ccw(c112.202,87.659) 111.846,86.176 ; R4.1@110.903,86.859 ccw(c111.492,87.199) 111.316,86.543 ; R4.1@110.903,86.859 ccw(c111.492,87.199) 111.316,86.543 ; R4.1@110.903,86.859 ccw(c111.492,87.199) 111.316,86.543 ; R4.1@110.981,86.474 cw(c111.367,85.78) 111.671,86.513 ; R4.1@110.981,86.474 cw(c111.367,85.78) 111.671,86.513 ; R4.1@110.981,86.474 cw(c111.367,85.78) 111.671,86.513 ; R4.1@110.987,86.477 cw(c111.241,86.037) 111.372,86.528 ; R4.1@110.987,86.477 cw(c111.241,86.037) 111.372,86.528 ; R4.1@110.987,86.477 cw(c111.241,86.037) 111.372,86.528 ; R4.1@111.123,86.986 ccw(c112.243,87.633) 111.908,86.384 ; R4.1@111.123,86.986 ccw(c112.243,87.633) 111.908,86.384 ; R4.1@111.123,86.986 ccw(c112.243,87.633) 111.908,86.384 ; R4.1@111.141,86.95 ccw(c111.394,87.062) 111.322,86.795 ; R4.1@111.141,86.95 ccw(c111.394,87.062) 111.322,86.795 ; R4.1@111.141,86.95 ccw(c111.394,87.062) 111.322,86.795 ; R4.1@111.145,86.943 ccw(c111.76,87.197) 111.505,86.582 ; R4.1@111.145,86.943 ccw(c111.76,87.197) 111.505,86.582 ; R4.1@111.145,86.943 ccw(c111.76,87.197) 111.505,86.582 ; R4.1@111.16,86.702 cw(c111.288,86.667) 111.323,86.795 ; R4.1@111.16,86.702 cw(c111.288,86.667) 111.323,86.795 ; R4.1@111.16,86.702 cw(c111.288,86.667) 111.323,86.795 ; 114.875,84.878 ccw(c113.823,85.93) YS.1@115.311,85.93 ; 114.875,84.878 ccw(c113.823,85.93) YS.1@115.311,85.93 ; 114.875,84.878 ccw(c113.823,85.93) YS.1@115.311,85.93 ; 115.096,85.129 cw(c116.144,84.848) YS.1@115.704,85.839 ; 115.096,85.129 cw(c116.144,84.848) YS.1@115.704,85.839 ; 115.096,85.129 cw(c116.144,84.848) YS.1@115.704,85.839 ; YS.1@115.234,85.642 cw(c115.867,85.473) YS.1@115.601,86.072 ; YS.1@115.234,85.642 cw(c115.867,85.473) YS.1@115.601,86.072 ; YS.1@115.234,85.642 cw(c115.867,85.473) YS.1@115.601,86.072 ; 115.309,85.311 ccw(c114.69,85.93) YS.1@115.565,85.93 ; 115.309,85.311 ccw(c114.69,85.93) YS.1@115.565,85.93 ; 115.309,85.311 ccw(c114.69,85.93) YS.1@115.565,85.93
  Top Layer w0.6: YS.1@115.664,86.6 R8.1@115.664,90.881 ; 115.664,88.363 cw(c116.269,88.363) C8.2@115.841,88.791 ; 115.664,88.363 cw(c116.269,88.363) C8.2@115.841,88.791 ; 115.664,88.363 cw(c116.269,88.363) C8.2@115.841,88.791 ; 115.664,89.501 ccw(c116.269,89.501) C8.2@115.841,89.073 ; 115.664,89.501 ccw(c116.269,89.501) C8.2@115.841,89.073 ; 115.664,89.501 ccw(c116.269,89.501) C8.2@115.841,89.073 ; 115.664,90.287 cw(c116.269,90.287) R8.1@115.841,90.715 ; 115.664,90.287 cw(c116.269,90.287) R8.1@115.841,90.715 ; 115.664,90.287 cw(c116.269,90.287) R8.1@115.841,90.715
YS-U: R4.2 U1.29 | length 36
  Top Layer w0.254: U1.29@96.2,81.853 96.2,80.304 v2@96.393,80.112 ; v2(103.022,83.337) 103.632,83.947 110.363,83.947 110.753,84.337 ; R4.2@110.8,85.15 110.8,84.574 ; R4.2@111.1,84.734 R4.2@111.125,84.709 ; R4.2@111.125,84.912 R4.2@111.125,84.709 ; U1.29@96.113,81.241 cw(c95.903,81.031) 96.2,81.031 ; U1.29@96.113,81.241 cw(c95.903,81.031) 96.2,81.031 ; U1.29@96.113,81.241 cw(c95.903,81.031) 96.2,81.031 ; 96.2,80.468 ccw(c96.673,80.468) v2@96.339,80.133 ; 96.2,80.468 ccw(c96.673,80.468) v2@96.339,80.133 ; 96.2,80.468 ccw(c96.673,80.468) v2@96.339,80.133 ; 96.2,81.031 cw(c96.497,81.031) U1.29@96.287,81.241 ; 96.2,81.031 cw(c96.497,81.031) U1.29@96.287,81.241 ; 96.2,81.031 cw(c96.497,81.031) U1.29@96.287,81.241 ; U1.29@96.2,81.081 ccw(c97.286,81.081) v2@96.518,80.313 ; U1.29@96.2,81.081 ccw(c97.286,81.081) v2@96.518,80.313 ; U1.29@96.2,81.081 ccw(c97.286,81.081) v2@96.518,80.313 ; v2@96.231,80.326 ccw(c96.043,80.55) 96.297,80.697 ; v2@96.231,80.326 ccw(c96.043,80.55) 96.297,80.697 ; v2@96.231,80.326 ccw(c96.043,80.55) 96.297,80.697 ; 96.255,80.875 cw(c96.752,81.009) U1.29@96.307,81.266 ; 96.255,80.875 cw(c96.752,81.009) U1.29@96.307,81.266 ; 96.255,80.875 cw(c96.752,81.009) U1.29@96.307,81.266 ; v2@103.022,83.55 ccw(c103.022,84.065) 103.386,83.701 ; v2@103.022,83.55 ccw(c103.022,84.065) 103.386,83.701 ; v2@103.022,83.55 ccw(c103.022,84.065) 103.386,83.701 ; v2@103.235,83.337 cw(c103.75,83.337) 103.386,83.701 ; v2@103.235,83.337 cw(c103.75,83.337) 103.386,83.701 ; v2@103.235,83.337 cw(c103.75,83.337) 103.386,83.701 ; R4.2@110.676,84.748 cw(c110.615,84.574) 110.8,84.574 ; R4.2@110.676,84.748 cw(c110.615,84.574) 110.8,84.574 ; R4.2@110.676,84.748 cw(c110.615,84.574) 110.8,84.574 ; 110.753,84.337 110.563,84.337 110.8,84.574 ; 110.753,84.337 R4.2@111.125,84.709 ; 110.8,84.574 cw(c110.985,84.574) R4.2@110.924,84.748 ; 110.8,84.574 cw(c110.985,84.574) R4.2@110.924,84.748 ; 110.8,84.574 cw(c110.985,84.574) R4.2@110.924,84.748
  Bottom Layer w0.254: v2(96.368,80.162) 98.45,80.162 100.99,82.702 102.387,82.702 v2(103.022,83.337) ; v2@96.518,80.012 cw(c96.882,79.648) 96.882,80.162 ; v2@96.518,80.012 cw(c96.882,79.648) 96.882,80.162 ; v2@96.518,80.012 cw(c96.882,79.648) 96.882,80.162 ; v2@96.518,80.313 ccw(c96.882,80.677) 96.882,80.162 ; v2@96.518,80.313 ccw(c96.882,80.677) 96.882,80.162 ; v2@96.518,80.313 ccw(c96.882,80.677) 96.882,80.162 ; 102.659,82.974 ccw(c102.295,83.337) v2@102.809,83.337 ; 102.659,82.974 cw(c103.022,82.61) v2@103.022,83.124 ; 102.659,82.974 ccw(c102.295,83.337) v2@102.809,83.337 ; 102.659,82.974 cw(c103.022,82.61) v2@103.022,83.124 ; 102.659,82.974 ccw(c102.295,83.337) v2@102.809,83.337 ; 102.659,82.974 cw(c103.022,82.61) v2@103.022,83.124
YS_D: U1.4 YS.2 | length 26.8
  Top Layer w0.254: U1.4@99.825,85.478 104.932,85.471 v2(105.081,85.321) ; U1.4@100.437,85.39 cw(c100.645,85.182) 100.645,85.476 ; U1.4@100.437,85.39 cw(c100.645,85.182) 100.645,85.476 ; U1.4@100.437,85.39 cw(c100.645,85.182) 100.645,85.476 ; U1.4@100.437,85.564 ccw(c100.649,85.776) 100.649,85.476 ; U1.4@100.437,85.564 ccw(c100.649,85.776) 100.649,85.476 ; U1.4@100.437,85.564 ccw(c100.649,85.776) 100.649,85.476 ; 104.205,85.472 cw(c104.204,84.445) v2@104.931,85.17 ; 104.205,85.472 cw(c104.204,84.445) v2@104.931,85.17 ; 104.205,85.472 cw(c104.204,84.445) v2@104.931,85.17 ; 104.573,85.377 ccw(c104.702,85.601) v2@104.91,85.447 ; 104.573,85.377 ccw(c104.702,85.601) v2@104.91,85.447 ; 104.573,85.377 ccw(c104.702,85.601) v2@104.91,85.447
  Bottom Layer w0.254: v2(105.081,85.321) 107.289,87.528 111.252,87.528 112.206,86.574 112.409,86.574 ; v2@105.081,85.534 ccw(c105.081,86.048) 105.445,85.684 ; v2@105.081,85.534 ccw(c105.081,86.048) 105.445,85.684 ; v2@105.081,85.534 ccw(c105.081,86.048) 105.445,85.684 ; v2@105.294,85.321 cw(c105.809,85.321) 105.445,85.684 ; v2@105.294,85.321 cw(c105.809,85.321) 105.445,85.684 ; v2@105.294,85.321 cw(c105.809,85.321) 105.445,85.684
  Bottom Layer w0.6: 112.409,86.574 112.903,86.081 YS.2@113.995,86.081 ; 113.104,86.081 cw(c113.104,85.044) YS.2@113.837,85.777 ; 113.104,86.081 cw(c113.104,85.044) YS.2@113.837,85.777 ; 113.104,86.081 cw(c113.104,85.044) YS.2@113.837,85.777 ; 113.459,85.995 ccw(c113.622,86.278) YS.2@113.842,86.037 ; 113.459,85.995 ccw(c113.622,86.278) YS.2@113.842,86.037 ; 113.459,85.995 ccw(c113.622,86.278) YS.2@113.842,86.037
ZFKZ: 
pads on no net: U4.6
copper on no net:
  other v7: 93.294,44.069 93.37,45.466 93.37,46.914 93.37,48.412 93.37,49.86
  other v8: 82.557,57.679 125.775,60.079 89.13,119.579 119.262,119.579

## Polygon pours and split planes (outlines as drawn)
GND on Bottom Layer "Top Layer-No Net" (solid, remove dead copper, pour order 3): 90.768,111.43 85.917,111.43 85.917,99.951 85.939,99.929 85.883,99.873 83.25,99.873 82.633,99.873 79.989,97.229 79.973,97.213 79.973,62.459 79.973,62.128 80.583,61.519 80.811,61.29 84.52,61.29 84.52,60.935 85.866,59.588 86.095,59.36 86.095,55.169 85.764,55.169 84.037,53.442 83.707,53.772 80.507,53.772 80.227,53.772 79.897,53.442 79.922,53.416 79.922,52.019 84.317,52.019 85.561,50.775 85.79,50.546 85.79,46.584 85.79,45.212 85.561,44.983 85.002,44.425 84.596,44.425 80.557,44.425 80.303,44.679 80.024,44.399 80.024,43.967 80.024,31.53 79.989,31.494 79.999,31.484 79.999,30.759 80.126,30.759 80.405,30.48 80.634,30.251 80.862,30.251 81.231,30.251 81.264,30.218 98.312,30.218 98.889,30.218 99.049,30.378 99.531,30.861 99.531,30.886 99.531,31.443 99.589,31.5 99.589,60.123 99.589,60.56 100.573,61.544 101.106,62.078 101.182,62.078 121.297,62.078 121.319,62.1 121.392,62.027 121.731,62.027 121.832,62.027 122.442,61.417 122.594,61.265 122.594,60.731 122.594,58.928 122.772,58.75 122.772,58.115 122.823,58.115 123.28,57.658 123.458,57.48 123.915,57.48 124.271,57.48 124.372,57.379 126.735,57.379 127.471,57.379 128.081,57.988 128.489,58.396 128.489,59.415 128.489,96.996 127.11,98.374 125.414,98.374 123.839,99.949 123.753,99.863 122.3,99.863 122.3,99.968 122.239,100.029 122.188,100.079 122.188,111.43 115.279,111.43 115.228,111.481 115.254,111.455 115.254,105.004 115.228,105.004 113.908,103.683 113.755,103.53 93.816,103.53 92.8,103.53 92.013,104.318 90.768,105.562 90.768,107.086 90.768,111.049 91.124,111.404
GND on Top Layer "Top Layer-No Net" (hatched 90Degree grid 0.508 track 0.254, remove dead copper, pour order 6): 99.568,34.878 79.927,34.878 79.953,34.904 79.953,45.953 85.363,45.953 85.414,46.003 85.439,46.029 85.439,50.728 85.439,50.779 85.337,50.88 85.109,51.109 81.934,51.109 81.832,51.109 81.096,50.372 81.096,49.585 81.096,48.543 79.953,48.543 79.953,53.725 80.003,53.776 80.257,54.03 80.257,54.055 84.169,54.055 84.423,54.309 86.404,56.29 86.48,56.29 86.48,59.491 86.328,59.643 85.16,60.812 83.839,60.812 80.613,60.812 79.927,61.497 79.968,61.538 79.968,78.169 79.968,78.531 80.156,78.719 80.169,78.732 80.53,78.732 82.967,78.732 82.968,78.732 82.968,81.262 80.624,81.262 80.594,81.292 80.577,81.309 80.308,81.309 80.308,81.386 79.978,81.716 79.968,81.726 79.968,81.908 79.968,97.182 81.402,98.616 83.128,98.616 83.128,98.708 84.144,99.724 84.351,99.932 85.968,99.932 85.968,112.043 86.806,112.882 90.138,112.882 90.138,105.287 92.068,103.357 92.322,103.611 111.347,103.611 113.049,103.611 114.674,105.236 114.751,105.312 114.751,112.221 122.142,112.221 122.244,112.323 122.279,112.287 122.279,99.816 123.829,99.816 125.063,98.581 125.292,98.353 126.968,98.353 127.064,98.353 128.468,96.949 128.517,96.9 128.517,82.021 128.517,81.614 128.416,81.513 128.187,81.284 128.086,81.284 125.47,81.284 125.448,81.262 125.448,78.762 127.7,78.762 127.73,78.732 127.744,78.719 128.213,78.719 128.213,78.617 128.441,78.388 128.468,78.362 128.468,78.049 128.468,65.077 128.492,65.053 127.908,64.469 123.615,64.469 123.488,64.596 121.913,63.021 121.913,62.056 119.958,62.056 119.907,62.005 119.856,62.056 101.238,62.056 100.527,62.056 99.866,61.396 99.568,61.098 99.568,60.076 99.568,34.904

## Keep-outs
Keep-Out Layer:
  circle w0.1: c82.557,57.679 r1.45
  circle w0.1: c119.262,119.579 r1.45
  circle w0.1: c89.13,119.579 r1.45
  lines w0.1: 80,58.793 80,78.216 cw(c80.562,78.216) 80.562,78.778 ; 80,59.154 80,31.494 ccw(c81.276,31.494) 81.276,30.218 98.326,30.218 ccw(c98.318,31.5) 99.6,31.5 99.6,60.123 cw(c101.577,60.123) 101.577,62.1 121.53,62.1 cw(c121.53,60.884) 122.746,60.884 122.746,59.436 ccw(c124.8,59.436) 124.8,57.382 ; 80,81.955 80,97.229 85.95,99.929 86,99.979 86,119.634 cw(c88.245,119.634) 88.245,121.879 ; 80.01,81.955 ccw(c80.626,81.955) 80.626,81.339 ; 80.562,78.779 83,78.779 ; 80.626,81.339 83,81.339 ; 83,78.809 83,81.309 ; 88.195,121.879 90.922,121.879 92.431,120.371 99.187,120.371 100.695,121.879 107.458,121.879 108.737,120.599 111.76,120.599 113.04,121.879 120.141,121.879 ; 94.25,66.232 86.1,66.232 86.1,67.462 94.25,67.462 ; 94.3,66.232 94.3,67.462 ; 119.941,121.879 cw(c119.941,119.57) 122.25,119.57 122.25,100.029 122.311,99.862 128.5,96.996 128.5,81.869 ; 124.8,57.382 126.467,57.382 ccw(c126.467,59.415) 128.5,59.415 128.5,78.096 ; 125.48,78.809 125.48,81.309 ; 125.495,78.779 127.787,78.779 ; 125.495,81.339 127.94,81.339 ccw(c127.94,81.899) 128.5,81.899 ; 127.787,78.779 cw(c127.787,78.066) 128.5,78.066 ; 87.757,113.673 91.825,113.673 91.825,115.333 87.757,115.333 87.757,113.673 ; 93.218,106.274 93.218,117.297 94.082,118.161 107.239,118.161 108.356,117.043 108.356,106.401 107.442,105.486 94.005,105.486 93.218,106.274 ; 109.728,113.673 118.085,113.673 118.085,115.333 109.728,115.333 109.728,113.673
  lines w0.15: 89.535,65.801 89.535,64.668 90.805,64.668

## Other copper
Top Layer:
  rectangle net GND: 93.37,31.42 93.828,31.648
  rectangle net GND: 89.256,31.42 93.37,33.985
  rectangle net TY: 95.961,31.191 97.917,33.198
  region net GND: 94.844,32.207 94.844,35.027 89.306,35.027 89.306,32.207
  rectangle net 5V: 89.764,42.367 91.008,45.009
  rectangle net GND: 101.6,77.902 105.125,81.686
  rectangle net 5V: 86.258,51.943 87.884,54.381
  rectangle net GND: 87.249,38.658 89.75,40.615
  rectangle net GND: 86.563,36.373 88.951,38.622
  rectangle net BT: 114.122,63.83 116.967,66.116
  rectangle net NetC4_1: 100.635,75.082 103.149,76.632
  rectangle net BT: 106.985,76.759 121.641,78.765
  rectangle net GND: 118.262,80.01 124.003,82.88
  rectangle net GND: 106.248,80.493 118.415,82.525
  rectangle net BT: 113.817,72.542 117.983,77.14
  rectangle net BT: 115.087,65.938 118.059,73.203
  rectangle net BT: 121.488,76.759 122.453,78.867
  rectangle net 8.4V: 120.345,73.406 122.174,75.514
  rectangle net 8.4V: 120.32,68.859 122.346,75.566
  rectangle net NetC4_2: 102.189,65.583 103.759,74.143
  rectangle net NetC4_2: 103.581,65.405 105.029,69.825
  rectangle net NetC4_1: 100.178,65.634 101.194,76.835
  rectangle net NetC4_1: 99.314,65.049 100.635,69.139
  rectangle net NetC4_1: 98.4,67.054 100.046,70.714
  rectangle net BT: 97.233,58.496 98.044,59.233
Bottom Layer:
  rectangle net GND: 86.081,52.426 89.103,54.204
  rectangle net GND: 94.234,42.164 95.25,52.502
  rectangle net GND: 91.262,51.283 94.894,63.703
  rectangle net GND: 87.325,41.91 92.481,62.992
  rectangle net GND: 87.173,36.322 94.59,43.104
  rectangle net GND: 89.023,37.059 91.08,40.437
  rectangle net GND: 86.106,63.373 88.951,64.643
  rectangle net GND: 106.07,100.432 107.798,102.464
  rectangle net BT: 106.832,77.013 121.742,78.842
  rectangle net GND: 105.639,80.315 121.488,82.499
  rectangle net GND: 104.572,79.223 106.172,81.432
  rectangle net BT: 114.833,73.914 117.704,77.572
  rectangle net 8.4V: 120.32,73.406 122.606,75.717
  rectangle net 8.4V: 119.583,68.682 122.301,74.447
  rectangle net BT: 115.087,68.758 117.907,72.822
  rectangle net GND: 85.725,39.243 89.421,40.945
  rectangle net NetC4_2: 102.21,65.862 105.131,69.393
  rectangle net NetC4_2: 102.159,68.123 103.683,71.399
  rectangle net NetC4_1: 100.279,66.167 100.94,70.51
  rectangle net NetC4_1: 98.654,66.98 100.99,68.834
  rectangle net NetC4_1: 98.273,67.513 98.781,68.428
  rectangle net GND: 85.95,43.917 88.138,54.356
  rectangle net BT: 114.757,68.402 117.526,70.688
  rectangle net GND: 109.118,64.338 112.624,66.116
  rectangle net GND: 101.346,78.562 105.207,81.61
  rectangle net GND: 99.873,78.562 101.625,80.315
  rectangle net GND: 100.381,79.781 101.638,80.645
  rectangle net GND: 110.236,70.841 112.42,72.111
  rectangle net GND: 108.001,70.256 112.37,71.399
  rectangle net NetC4_1: 99.136,66.116 100.584,67.513

## Silkscreen, mask and mechanical layers (free items; w line width, h text height)
Top Overlay:
  circle w0.18: c84.556,47.93 r3.15
  circle w0.16: c125.175,84.532 r2.5
  lines w0.16: 109.652,95.987 112.37,95.987 112.37,97.434 109.652,97.434 109.652,95.987 ; 110.338,108.737 111.836,108.737 111.836,111.277 110.338,111.277 110.338,108.737 ; 113.64,95.987 116.281,95.987 116.281,97.434 113.64,97.434 113.64,95.987
  lines w0.2: 94.894,102.006 94.894,105.08 ; 94.894,118.389 94.894,120.142 ; 107.29,101.776 107.29,105.029
  lines w0.22: 92.964,30.48 96.749,30.48 ; 117.096,63.629 120.5,63.629 ; 117.125,63.598 117.125,68.729 ; 117.125,68.727 111.121,68.727 111.121,76.116 123.999,76.116 ; 120.5,63.598 120.5,68.729 ; 120.525,68.729 123.973,68.727 123.973,76.116 ; 122.475,81.748 127.825,81.748 ; 122.475,81.823 122.475,85.95 123.778,87.253 ; 123.825,87.273 127.85,87.273 127.85,81.773 ; 127.85,81.779 127.875,81.804 ; 81.198,46.488 83.067,44.619 87.917,44.619 87.924,51.219 81.198,51.219 81.198,46.488
  text "G-" at 97.739,118.745 h1.3
  text "-R" at 108.331,118.72 h1.3
  text "BC2" at 92.939,116.611 h0.85 r90
  text "OUT1" at 87.325,116.103 h0.85 r90
  text "GND" at 119.482,113.335 h1 r90
  text "HWPOW" at 109.601,112.37 h0.9 r90
  text "BC1" at 87.376,111.938 h0.9 r90
  text "M1" at 92.354,99.314 h1.6
  text "GND" at 84.861,97.155 h0.9
  text "CE" at 99.67,96.698 h0.9 r90
  text "IRQ" at 106.045,95.936 h0.9 r90
  text "3V3" at 97.028,95.809 h0.9 r90
  text "GND" at 98.374,95.809 h0.9 r90
  text "SCK" at 102.184,95.733 h0.9 r90
  text "CSN" at 100.889,95.656 h0.9 r90
  text "MOSI" at 103.429,95.148 h0.9 r90
  text "MISO" at 104.699,95.047 h0.9 r90
  text "SWIM/FM" at 113.309,93.548 h0.8
  text "16" at 92.38,89.637 h0.7 r90
  text "RST" at 119.151,86.309 h0.8
  text "+" at 120.066,83.642 h1.8
  text "1" at 100.609,81.661 h0.8
  text "+" at 122.809,77.445 h2.5
  text "+" at 113.182,76.708 h2.5
  text "+" at 116.916,76.683 h2.5
  text "AM" at 90.957,73.889 h1 r90
  text "Y>" at 92.964,73.889 h1 r90
  text "GN" at 97.028,73.812 h1 r90
  text "3.3V" at 87.02,73.787 h1 r90
  text "Y30" at 88.951,73.787 h1 r90
  text "<Z" at 94.996,73.762 h1 r90
  text "NTC" at 125.603,73.177 h0.8 r90
  text "-" at 125.806,71.145 h2.3
  text "BAT" at 116.484,69.977 h1 r90
  text "8.4V" at 121.818,69.672 h1 r90
  text "SWIM" at 86.309,69.367 h0.8
  text "RST" at 91.796,69.291 h0.8
  text "+" at 96.19,64.999 h2
  text "5V" at 89.383,62.941 h1
  text "+" at 92.024,62.433 h2
  text "-" at 86.665,62.306 h2.2
  text "+" at 80,44.628 h2
  text "+" at 99.339,33.553 h1.5 r90
Bottom Overlay:
  circle w0.2: c84.497,49.733 r2.6
  lines w0.16: 95.021,101.776 95.021,105.181 ; 96.19,95.123 96.19,93.32 96.596,92.913 104.75,92.913 105.105,93.269 105.105,95.199 ; 97.46,95.199 97.46,93.751 97.485,93.726 106.553,93.726 106.655,93.828 106.655,95.275 ; 98.6,70.028 98.6,63.119 104.369,63.119 104.369,69.875 104.521,70.028 98.628,70.028 ; 106.756,101.879 106.756,105.054
  lines w0.25: 96.063,101.956 96.063,105.029 ; 108.001,101.802 108.001,105.054
  lines w0.254: 90.932,117.069 92.024,118.161 ; 91.592,110.846 92.685,111.938 ; 91.618,111.938 92.71,110.846
  text "-G" at 99.898,118.643 h1.2
  text "38BC2" at 95.021,118.593 h0.8
  text "R-" at 110.211,118.567 h1.2
  text "38OUT" at 87.401,118.186 h0.8 r90
  text "HWPOW" at 109.576,116.713 h0.9 r90
  text "GND" at 119.609,115.976 h1 r90
  text "38BC1" at 87.452,113.309 h0.8 r90
  text "FL" at 114.427,110.414 h1.2
  text "SCK" at 101.778,98.146 h0.9 r90
  text "GND" at 107.213,98.12 h0.9 r90
  text "IRQ" at 97.917,98.095 h0.9 r90
  text "3V3" at 105.664,98.095 h0.9 r90
  text "MISO" at 99.212,98.069 h0.9 r90
  text "CE" at 104.343,98.069 h0.9 r90
  text "CSN" at 103.048,98.044 h0.9 r90
  text "GND" at 96.698,98.019 h0.9 r90
  text "MOSI" at 100.482,97.993 h0.9 r90
  text "3.3" at 118.796,95.936 h1
  text "GND" at 83.058,95.021 h1 r90
  text "SWIM" at 118.847,93.32 h1
  text "GND" at 118.593,90.932 h1
  text "RST" at 118.415,88.265 h1
  text "YS" at 112.192,85.395 h1.5
  text "BT" at 121.031,84.531 h1.5 r90
  text "+" at 123.469,77.394 h2
  text "8.4V" at 121.133,73.254 h1 r90
  text "GND" at 125.654,72.568 h1 r270
  text "BT" at 117.018,71.984 h1.4
  text "GND" at 86.004,64.11 h1.15 r180
  text "MO" at 107.544,63.652 h1.5
  text "+" at 93.37,62.255 h2.2
  text "DC 5V" at 93.091,60.681 h1.2
  text "2000MA" at 93.701,58.699 h1.2
  text "C1" at 85.166,53.315 h1.2
  text "+" at 81.458,48.87 h1.8
  text "201900909DG" at 90.018,44.399 h1 r270
  text "BH" at 88.265,34.569 h1.2
  text "B2" at 83.439,34.544 h1.2
  text "B1" at 93.015,34.544 h1.2
  text "TY" at 98.12,34.519 h1.2
Top Solder:
  lines w0.7: 103.048,76.683 101.041,76.683 ; 101.041,76.683 100.355,75.997 100.355,73.787 99.72,73.152 99.72,76.03 100.373,76.683 101.041,76.683
  lines w1: 102.26,75.616 102.26,76.505 ; 102.286,72.949 102.286,73.889